# EAGLE board WarningFlasher (EAGLE 5.11)
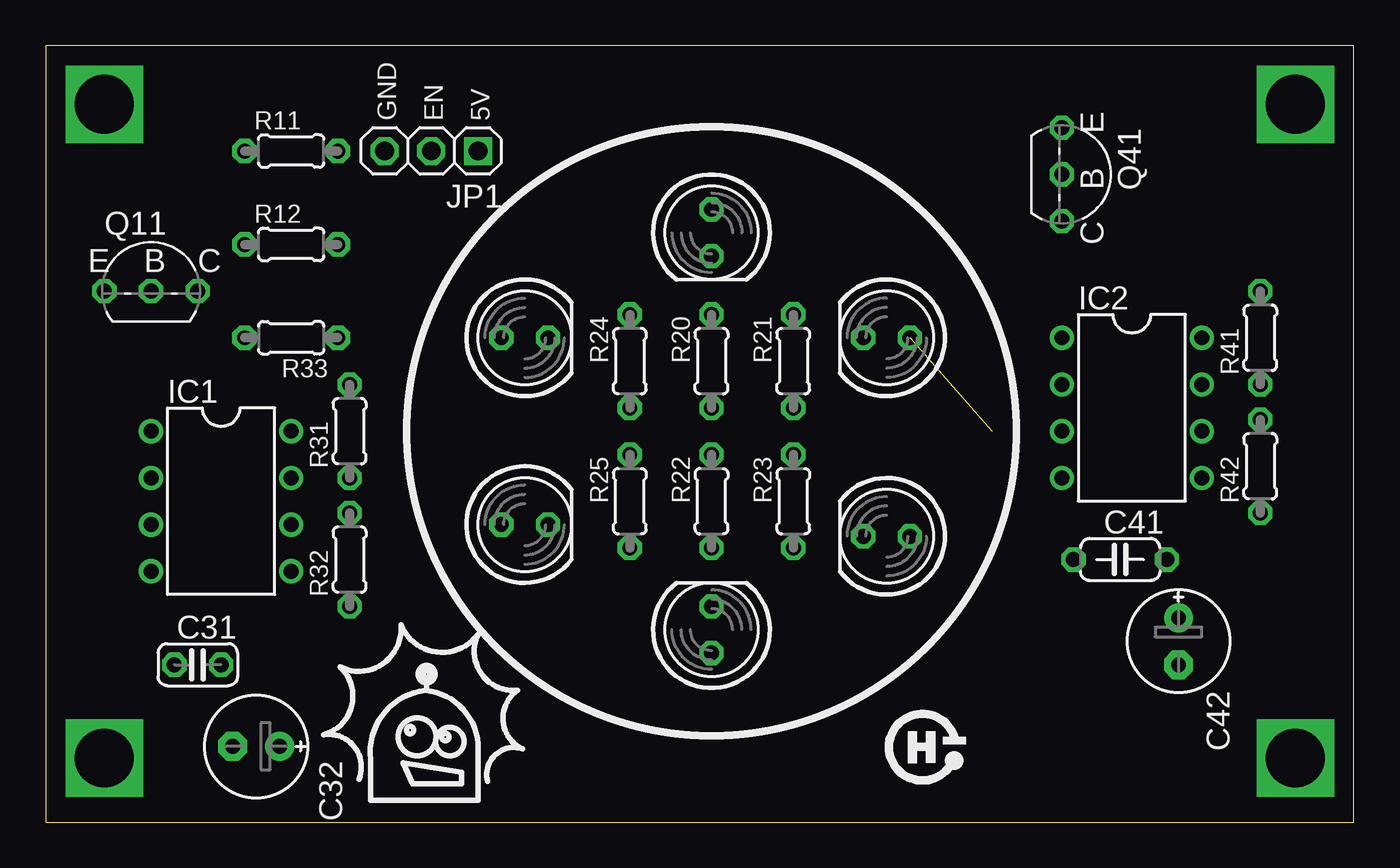
[diagram p0: board, top side]
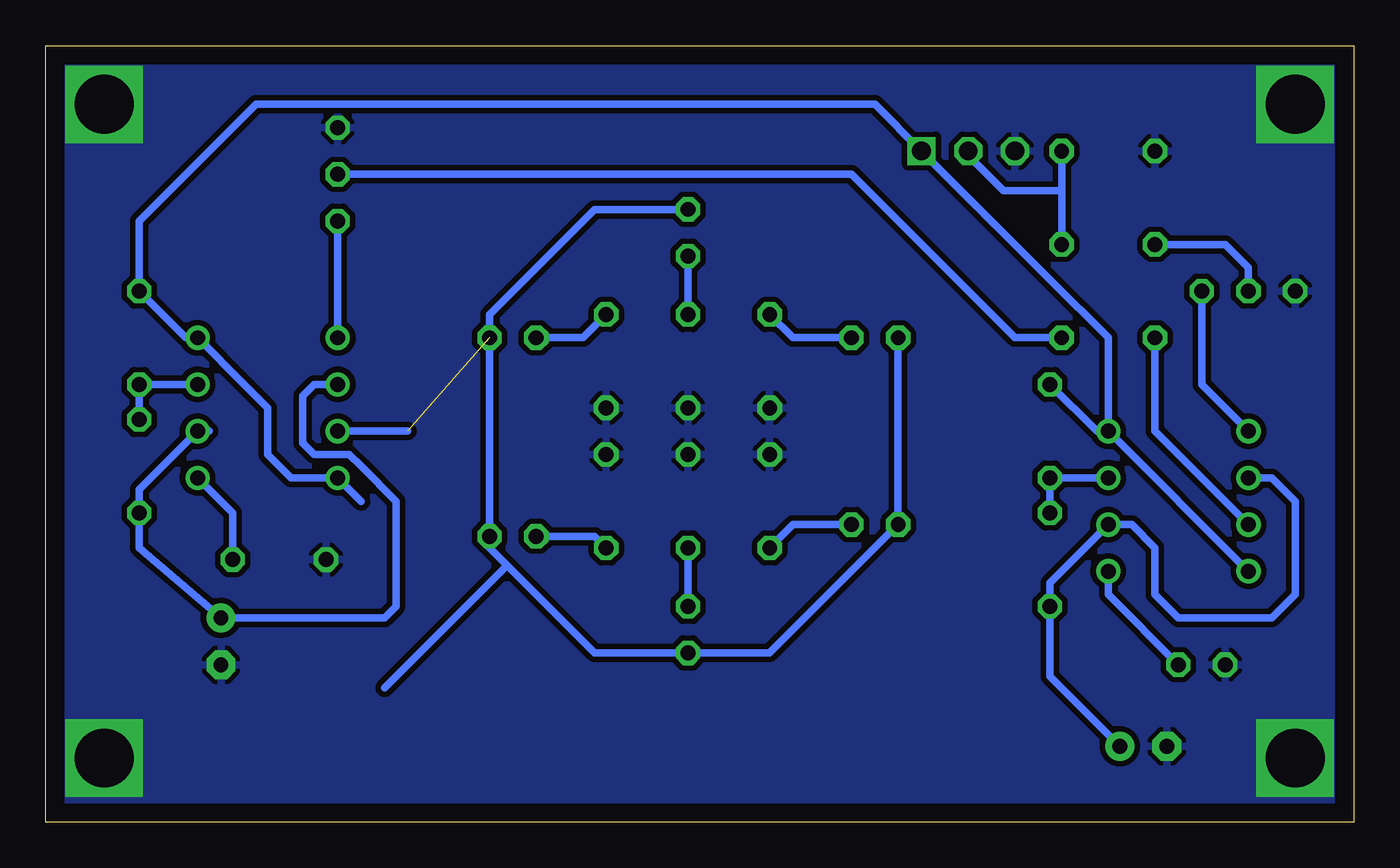
[diagram p1: board, bottom side, seen from below]

Size 71.11 x 42.22 mm. Coordinates in mm from the lower left corner, seen from the top.
Outline: 0,42.22 0,0 71.11,0 71.11,42.22 0,42.22
Copper layers (1*16): Top 0.035mm / dielectric 1.5mm / Bottom 0.035mm
Design rules "default": minimum track width 10mil, minimum drill 24mil, track to track 8mil, track to pad 8mil, pad to pad 8mil, via to via 8mil, smd to smd 8mil, copper to edge 40mil, drill to drill 8mil, minimum pad ring 10mil, minimum via ring 8mil, stop-mask expansion 4mil, vias tented up to drill 0mil, thermal gap 10mil

## Footprints (pad centres in the part's own frame; a part is rotated, then mirrored left to right if it is on the bottom)
C025-024X044 = drill 0.813 octagon: 1 -1.27,0; 2 1.27,0
E2,5-6E = drill 0.813 pad 1.575 round: + -1.27,0 | drill 0.813 pad 1.575 octagon: - 1.27,0
C050-024X044 = drill 0.813 octagon: 1 -2.54,0; 2 2.54,0
DIL08 = drill 0.813 pad 1.27 round: 1 -3.81,-3.81; 2 -1.27,-3.81; 3 1.27,-3.81; 4 3.81,-3.81; 5 3.81,3.81; 6 1.27,3.81; 7 -1.27,3.81; 8 -3.81,3.81
1X03-S = drill 1.016 square: 1 -2.54,0 | drill 1.016 octagon: 2 0,0; 3 2.54,0
LED5MM = drill 0.813 octagon: A -1.27,0; K 1.27,0
TO92-CBE = drill 0.813 octagon: B 0,0; C 2.54,0; E -2.54,0
0204/5 = drill 0.813 octagon: 1 -2.54,0; 2 2.54,0

## Placement (x,y rotation side)
C31  0.01uF  [C025-024X044]  8.26,8.56 180 top
C32  1uF  [E2,5-6E]  11.43,4.12 180 top
C41  0.01uF  [C050-024X044]  58.42,14.28 180 top
C42  1uF  [E2,5-6E]  61.59,9.83 270 top
IC1  NE555  [DIL08]  9.53,17.45 270 top
IC2  NE555  [DIL08]  59.05,22.53 270 top
JP1  MCU  [1X03-S]  20.95,36.5 180 top
LED1  YEL  [LED5MM]  36.2,32.05 270 top
LED2  YEL  [LED5MM]  45.72,26.34 180 top
LED3  YEL  [LED5MM]  36.2,10.46 90 top
LED4  YEL  [LED5MM]  45.72,15.54 180 top
LED5  YEL  [LED5MM]  26.04,26.34 0 top
LED6  YEL  [LED5MM]  26.04,16.18 0 top
Q11  2N4401  [TO92-CBE]  5.71,28.88 0 top
Q41  2N4401  [TO92-CBE]  55.24,35.23 270 top
R11  10K  [0204/5]  13.34,36.5 0 top
R12  1K  [0204/5]  13.34,31.42 0 top
R20  82  [0204/5]  36.2,25.07 90 top
R21  82  [0204/5]  40.64,25.07 90 top
R22  82  [0204/5]  36.2,17.45 270 top
R23  82  [0204/5]  40.64,17.45 270 top
R24  82  [0204/5]  31.75,25.07 90 top
R25  82  [0204/5]  31.75,17.45 270 top
R31  100K  [0204/5]  16.51,21.26 90 top
R32  22K  [0204/5]  16.51,14.28 90 top
R33  1K  [0204/5]  13.34,26.34 180 top
R41  33K  [0204/5]  66.04,26.34 90 top
R42  330K  [0204/5]  66.04,19.35 90 top
U$1  OSHW-LOGO  [OSHW-LOGO]  47.62,4.12 0 top
U$2  BOT-THOUGHTS  [BOT-THOUGHTS]  20.95,3.48 0 top

## Library data of the parts
C31 C32 C41 C42 R11 R12 R20-R25 R31-R33 R41 R42 = rcl
IC1 IC2 = linear
JP1 = pinhead-2
LED1-LED6 = led
Q11 Q41 U$2 = mes
U$1 = SparkFun

## Nets
ENABLE: JP1.2 R11.2 R12.2
GND: C31.2 C32.- C41.2 C42.- JP1.3 Q11.E Q41.E R11.1 R20.1 R21.1 R22.1 R23.1 R24.1 R25.1
N$2: C41.1 IC2.5
N$3: IC1.3 R33.2
N$4: IC2.1 Q41.C
N$5: Q41.B R33.1
N$6: LED1.K R20.2
N$7: IC1.1 Q11.C
N$8: IC2.3 LED1.A LED2.A LED3.A LED4.A LED5.A LED6.A
N$9: C31.1 IC1.5
N$10: LED5.K R24.2
N$11: C32.+ IC1.2 IC1.6 R32.1
N$12: LED2.K R21.2
N$13: IC1.7 R31.1 R32.2
N$14: LED6.K R25.2
N$15: IC2.7 R41.1 R42.2
N$17: C42.+ IC2.2 IC2.6 R42.1
N$18: Q11.B R12.1
N$19: LED3.K R22.2
N$22: LED4.K R23.2
VCC: IC1.4 IC1.8 IC2.4 IC2.8 JP1.1 R31.2 R41.2

## Tracks (layer width: path | path; a pad name or v marks a point on that pad's centre or on a via)
ENABLE
  Bottom 0.406: R12.2 15.88,34.34 | 15.88,34.34 R11.2 | JP1.2 20.95,36.25 19.05,34.34 15.88,34.34
GND  (via drill 3.2)
  other vias: 67.94,39.04 67.94,3.48 3.17,3.48 3.17,39.04
  pour Bottom (isolate 0.305): 70.48,41.58 70.48,0.94 0.64,0.94 0.64,41.58
N$2
  Bottom 0.406: C41.1 60.96,16.81 IC2.5
N$3
  Bottom 0.406: IC1.3 6.99,17.45 10.79,21.26 R33.2
N$4
  Bottom 0.406: Q41.C 55.24,30.79 55.24,29.51 IC2.1
N$5
  Bottom 0.406: Q41.B 51.44,35.23 31.11,35.23 27.3,35.23 18.41,26.34 R33.1
N$6
  Bottom 0.406: R20.2 LED1.K
N$7
  Bottom 0.406: Q11.C 8.26,23.8 IC1.1
N$8  (1 unrouted)
  Bottom 0.406: 51.44,21.26 IC2.3 | 52.7,7.29 48.26,11.73 46.04,13.96 | LED1.A 40.64,33.33 41.27,33.33 46.99,27.61 LED2.A LED4.A 46.99,14.91 46.04,13.96 | 46.04,13.96 41.27,9.2 LED3.A 31.75,9.2 LED6.A LED5.A
N$9
  Bottom 0.406: IC1.5 13.34,12.37 C31.1
N$10
  Bottom 0.406: LED5.K 30.48,26.34 R24.2
N$11
  Bottom 0.406: C32.+ 16.51,7.92 R32.1 16.51,13.01 IC1.6 12.06,16.18 10.79,14.91 10.79,12.37 9.53,11.1 4.45,11.1 3.17,12.37 3.17,17.45 4.45,18.72 IC1.2
N$12
  Bottom 0.406: LED2.K 41.91,26.34 R21.2
N$13
  Bottom 0.406: IC1.7 R31.1 R32.2
N$14
  Bottom 0.406: LED6.K 30.48,16.18 R25.2
N$15
  Bottom 0.406: IC2.7 R41.1 R42.2
N$17
  Bottom 0.406: IC2.2 56.52,23.8 57.15,23.16 57.15,20.62 56.52,19.99 54.61,19.99 53.98,19.35 52.07,17.45 52.07,14.91 52.07,11.73 52.7,11.1 55.24,11.1 57.15,11.1 C42.+ 66.04,14.91 R42.1 66.04,18.08 IC2.6 62.23,21.26
N$18
  Bottom 0.406: R12.1 6.99,31.42 5.71,30.15 Q11.B
N$19
  Bottom 0.406: LED3.K R22.2
N$22
  Bottom 0.406: LED4.K 41.27,15.54 R23.2
VCC
  Bottom 0.406: IC1.8 13.97,21.26 R31.2 | IC1.4 IC1.8 | IC1.8 13.34,26.34 16.51,29.51 JP1.1 26.04,39.04 55.24,39.04 59.69,39.04 66.04,32.69 R41.2 63.5,26.34 IC2.8 60.33,23.8 59.05,22.53 59.05,19.99 57.78,18.72 IC2.4 53.98,17.45

## Text on the board
tNames: GND | EN | 5V